# Altium PCB MAIN-4.PcbDoc
Units mil, origin at the board's own origin, x right, y up, seen from the top; angles counter-clockwise.
Board outline 2866.14 x 3216.54 mil, 4 copper layers (Top Layer, GND Plane, Power Plane, Bottom Layer); 59 components, 127 nets, 378 pads, 115 vias.
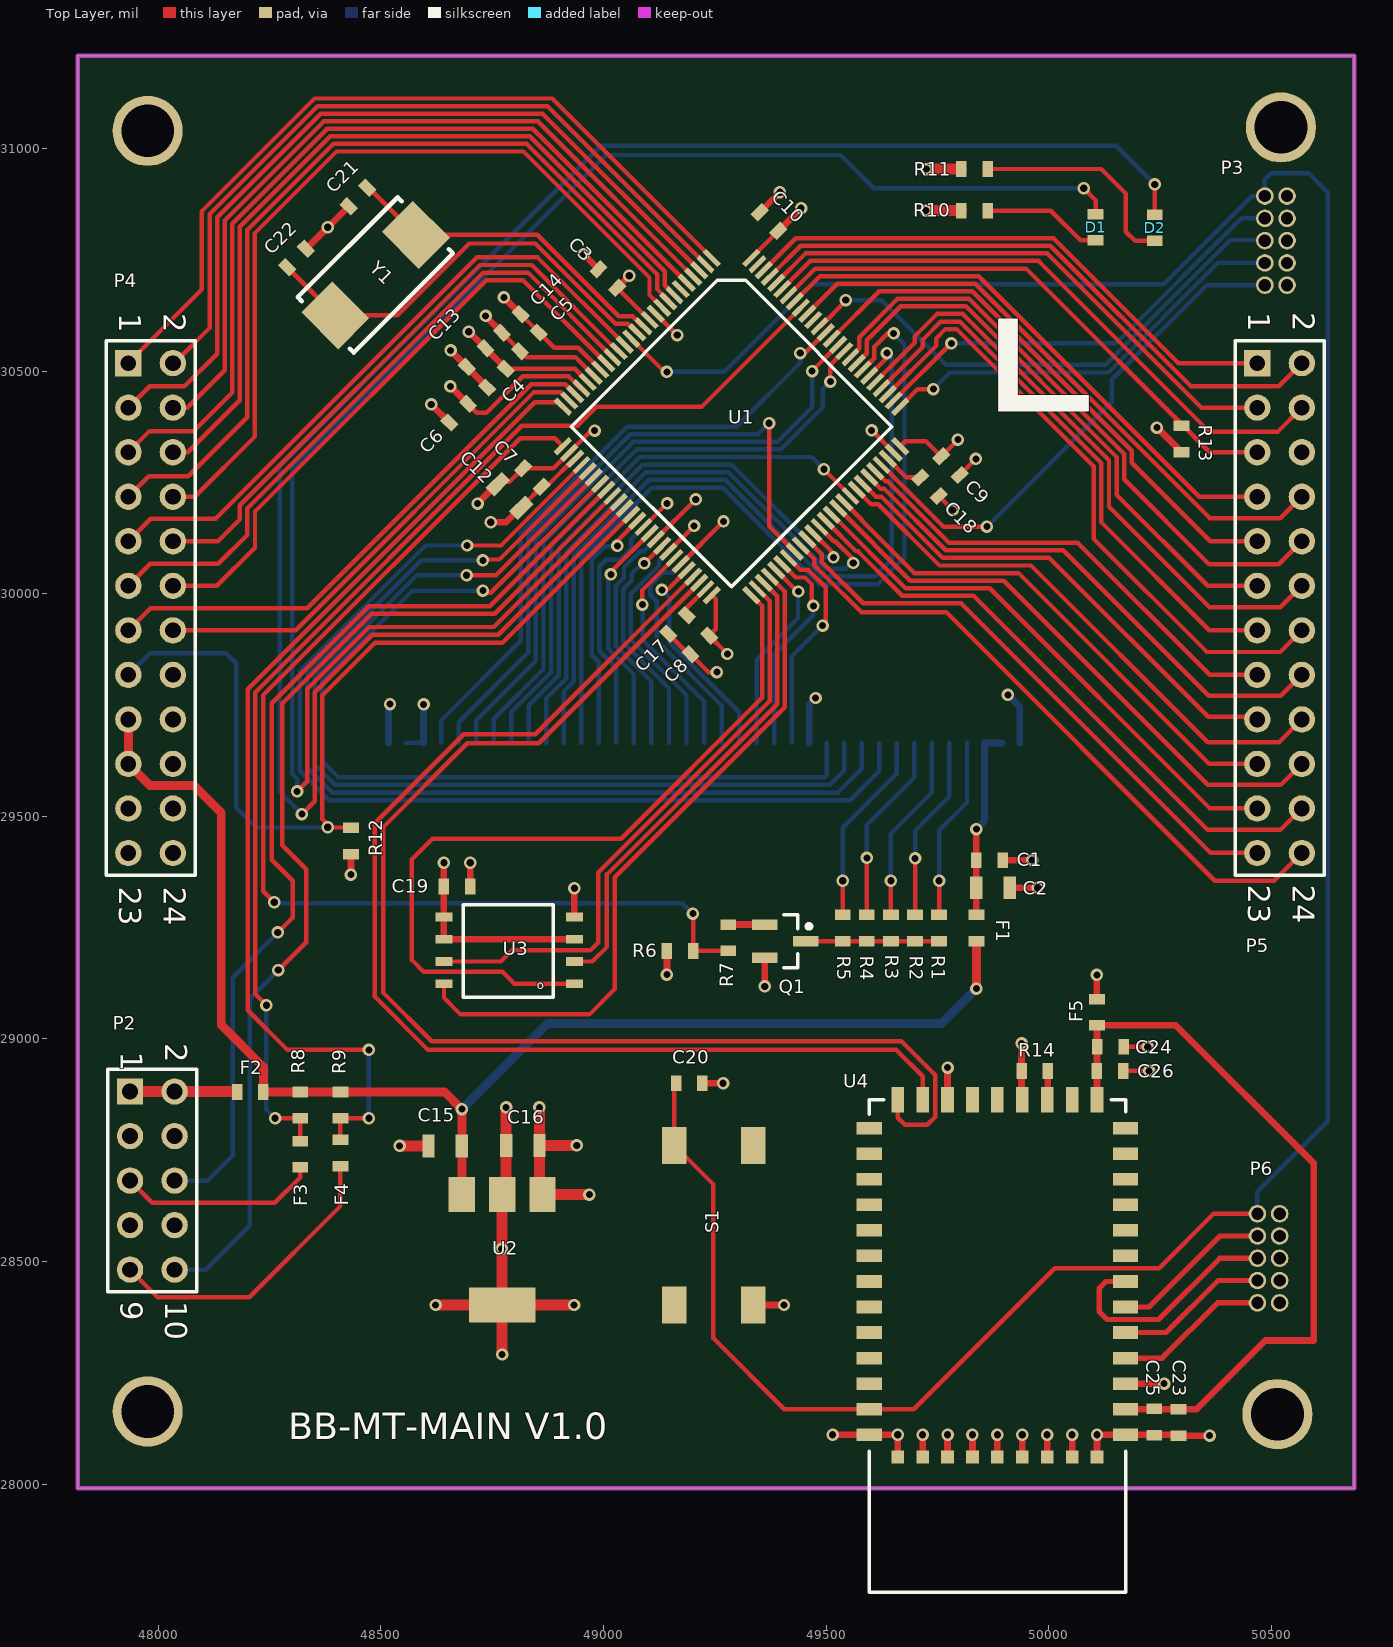
[diagram p0: Top Layer view]
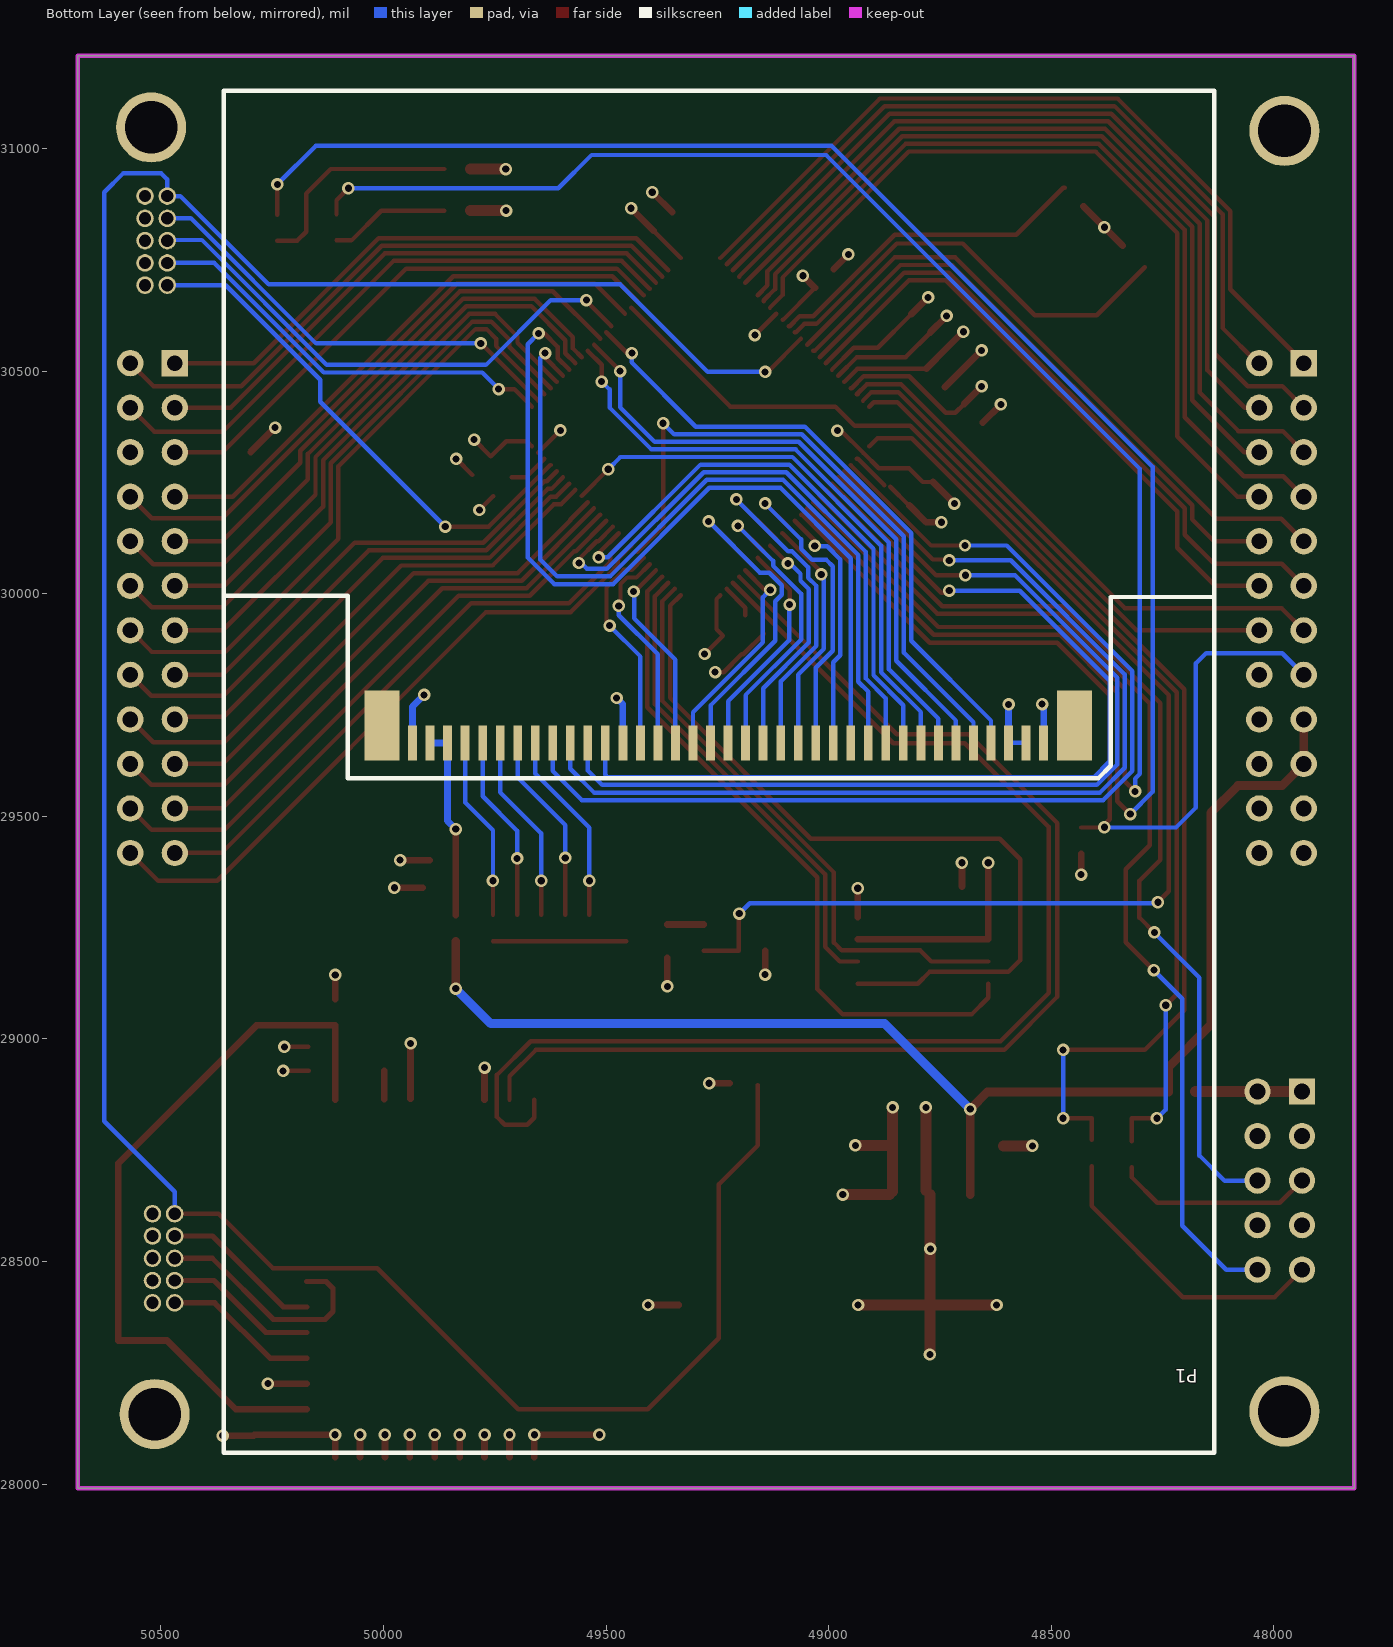
[diagram p1: Bottom Layer view, seen from below]
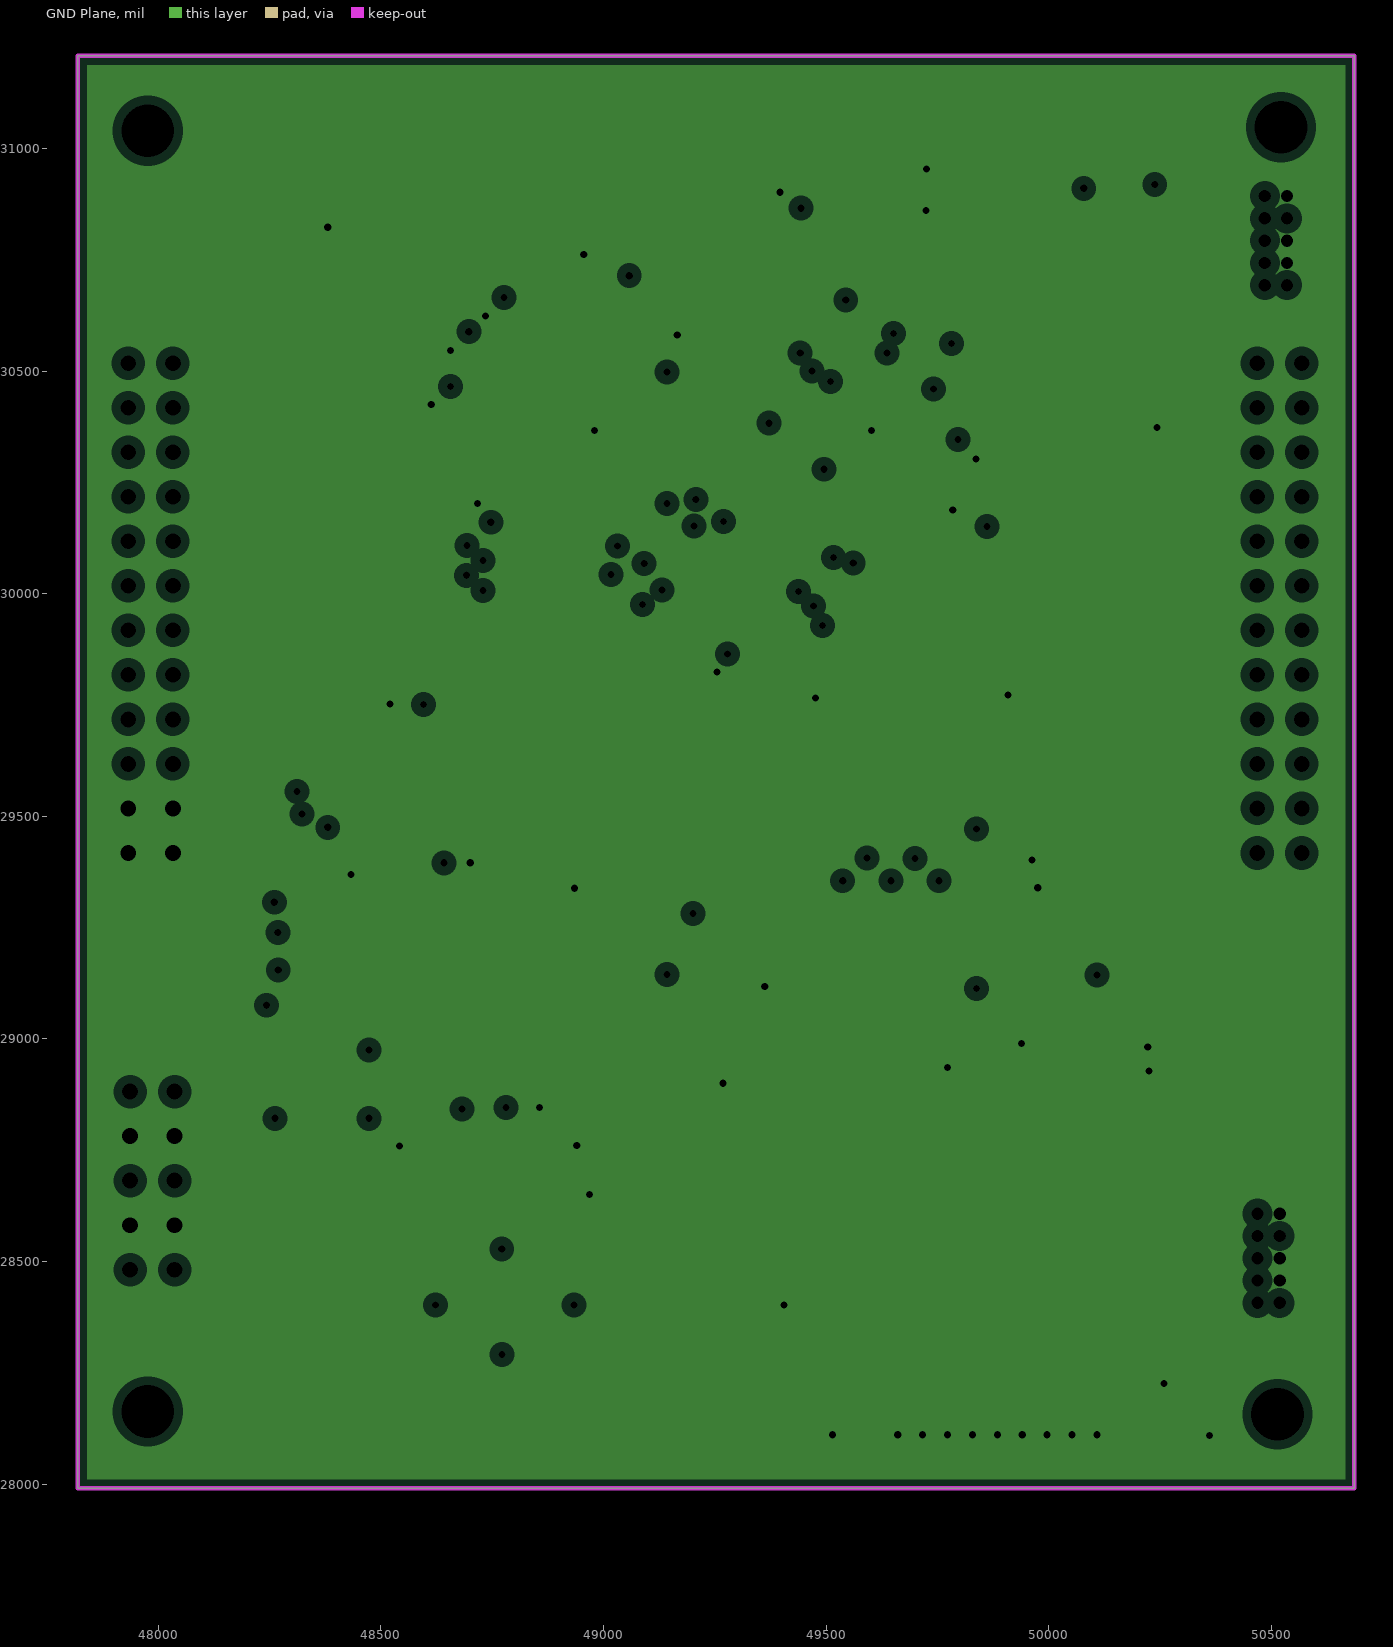
[diagram p2: GND Plane, clearances drawn from the general rule]
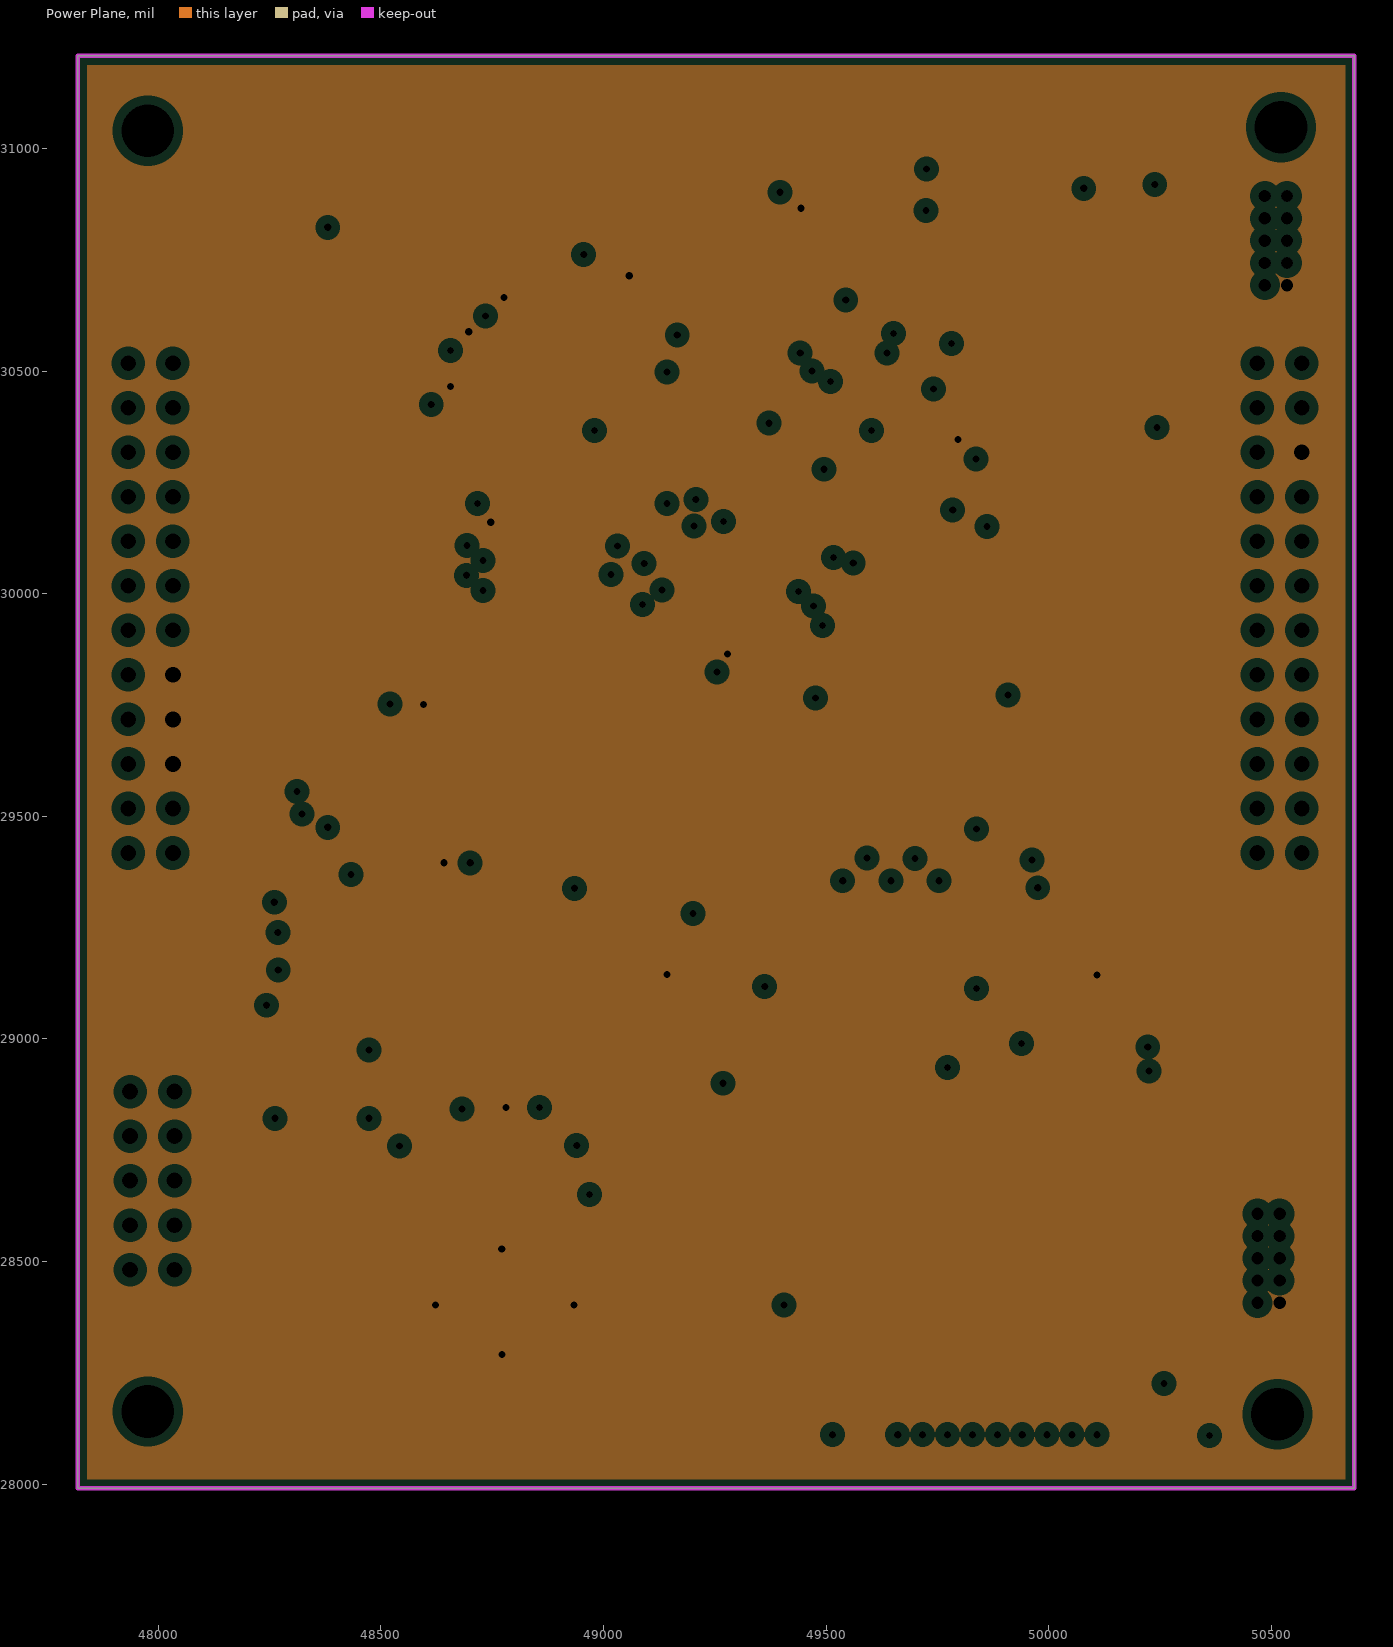
[diagram p3: Power Plane, clearances drawn from the general rule]

## Layer stack, top to bottom
Top Layer: signal copper 1.4
Dielectric: core 12.6, FR-4, Dk 4.8
GND Plane: plane copper 1.4, net GND
Dielectric: prepreg 12.6, FR-4, Dk 4.8
Power Plane: plane copper 1.4, net 3V3
Dielectric: core 12.6, FR-4, Dk 4.8
Bottom Layer: signal copper 1.4

## Board outline
47819.88,27991.14 50686.02,27991.14 50686.02,31207.68 47819.88,31207.68

## Design rules (kind name [scope] priority, off if disabled: settings)
Clearance [All] p1: gap=7
ComponentClearance [All] p1: gap=10 collisioncheckmode=3 verticalgap=0 showdistances=FALSE
HoleSize [All] p1: absolutevalues=TRUE maxlimit=250 minlimit=15 maxpercent=80.000 minpercent=20.000
MinimumAnnularRing [All] p1: minimumring=5
MinimumSolderMaskSliver FinePitchQFP [InComponent('U2') vs InComponent('U2')] p1: minsoldermaskwidth=0
MinimumSolderMaskSliver [All] p2: minsoldermaskwidth=10
PlaneClearance [All] p1: clearance=20
PlaneConnect [All] p1: planeconnectstyle=Relief reliefexpansion=20 reliefentries=4 reliefconductorwidth=10 reliefairgap=10
PolygonConnect ViaConnect [IsVia] p1: connectstyle=Direct reliefconductorwidth=10 reliefentries=4 polygonreliefangle="90 Angle"
PolygonConnect [All] p2: connectstyle=Relief reliefconductorwidth=10 reliefentries=4 polygonreliefangle="90 Angle"
RoutingPriority [InNet('GND')] p1: routingpriority=100
RoutingVias [All] p1: holewidth=15 width=20 viastyle="Through Hole" minholewidth=10 minwidth=15 maxholewidth=28 maxwidth=300
SMDNeckDown SMDNeckDown5v [InNet('5V')] p1: percent=100.000
SMDNeckDown SMDNeckDown3v3 [InNet('3V3')] p2: percent=100.000
SilkscreenOverComponentPads [All] p1: minsilkscreentomaskgap=10
SolderMaskExpansion [All] p1: expansion=4
Width Width_3V [InNet('3V3')] p1: maxlimit=25 minlimit=10 preferedwidth=25
Width Width_5V [InNet('5V')] p2: maxlimit=25 minlimit=10 preferedwidth=25
Width [All] p3: maxlimit=50 minlimit=10 preferedwidth=10
21 further rules are at their usual default settings.

## Classes and differential pairs
component class MAIN: C3 C4 C5 C6 C7 C8 C9 C10 C12 C13 C14 C15 C16 C17 C18 C19 C20 C21 C22 D1 D2 F2 F3 F4 P2 P3 P4 P5 R8 R9 R10 R11 R12 R13 S1 U1 U2 U3 Y1
component class WIFI: C23 C24 C25 C26 F5 P6 R14 U4
component class LCD: C1 C2 F1 P1 Q1 R1 R2 R3 R4 R5 R6 R7

## Components (designator, comment, footprint, x,y, rotation, side; value= is the part's Value field where it differs from the comment)
C1 "Cap" 0603 49867.13,29401.57 r180 top
C2 "Cap" 0805 49875,29339.57 r180 top
C3 "Cap" 0603 49009.84,30707.68 r315 top
C4 "Cap" 0603 48759.63,30484.04 r45 top
C5 "Cap" 0603 48833.45,30565.73 r45 top
C6 "Cap" 0603 48674.99,30405.3 r45 top
C7 "Cap" 0603 48840.55,30260.83 r315 top
C8 "Cap" 0603 49216.54,29884.84 r45 top
C9 "Cap" 0603 49779.53,30287.4 r135 top
C10 "Cap" 0603 49372.05,30835.63 r315 top
C12 "Cap" 0805 48789.37,30219.49 r315 top
C13 "Cap" 0603 48714.36,30530.3 r45 top
C14 "Cap" 0603 48793.1,30607.07 r45 top
C15 "Cap" 0805 48644.68,28759.84 r0 top
C16 "Cap" 0805 48818.9,28760.83 r180 top
C17 "Cap" 0603 49166.34,29931.1 r45 top
C18 "Cap" 0603 49732.28,30240.16 r135 top
C19 "Cap" 0603 48671.26,29342.52 r180 top
C20 "Cap" 0603 49192.91,28900.59 r180 top
C21 "Cap" 0603 48448.82,30890.75 r45 top
C22 "Cap" 0603 48311.02,30753.94 r225 top
C23 "Cap" 0603 50291.34,28138.78 r90 top
C24 "Cap" 0603 50138.78,28982.28 r180 top
C25 "Cap" 0603 50237.2,28139.76 r90 top
C26 "Cap" 0603 50137.8,28928.15 r180 top
D1 "LED2" 0603 50105.32,30822.83 r270 top
D2 "LED2" 0603 50238.19,30821.85 r270 top
F1 "Ferrite Chip" 0603 49837.6,29249.02 r90 top
F2 "Ferrite Chip" 0603 48206.69,28880.91 r0 top
F3 "Ferrite Chip" 0603 48318.9,28741.14 r270 top
F4 "Ferrite Chip" 0603 48409.45,28744.09 r270 top
F5 "Ferrite Chip" 0603 50108.27,29060.04 r90 top
P1 "ER-TFT032-2" ER-TFT032-2 49246.46,29599.84 r0 bottom locked
P2 "PWR_BRD" HDR2X5 47937.01,28881.89 r270 top
P3 "MCU JTAG" "JTAG PTH" 50535.43,30692.91 r180 top
P4 "Header 12X2" HDR2X12 47933.07,30517.72 r270 top locked
P5 "Header 12X2" HDR2X12 50468.5,30517.72 r270 top locked
P6 "ISM JTAG" "JTAG PTH" 50518.7,28407.48 r180 top
Q1 "NPN" SOT23_M 49408.46,29219.49 r0 top
R1 "Res2" 0603 49753.94,29249.02 r90 top
R2 "Res2" 0603 49699.8,29249.02 r90 top
R3 "Res2" 0603 49645.67,29249.02 r90 top
R4 "Res2" 0603 49591.54,29249.02 r90 top
R5 "Res2" 0603 49537.4,29249.02 r90 top
R6 "Res2" 0603 49172.24,29197.83 r180 top
R7 "Res2" 0603 49280.51,29227.36 r270 top
R8 "Res2" 0603 48318.9,28851.38 r90 top
R9 "Res2" 0603 48409.45,28851.38 r90 top
R10 "Res2" 0603 49833.66,30860.24 r0 top
R11 "Res2" 0603 49833.66,30953.74 r0 top
R12 "Res2" 0603 48433.07,29444.88 r90 top
R13 "Res2" 0603 50298.23,30347.44 r90 top
R14 "Res2" 0603 49968.5,28928.15 r180 top
S1 "SW-PB" FSM4JSMA 49248.03,28581.69 r180 top
U1 "STM32F205" LQFP-100 49243.11,30753.94 r315 top locked
U2 "NCP1117LP" SOT-223 48772.64,28650.59 r180 top
U3 "S25FL032P" SOC008 48949.8,29124.02 r180 top
U4 "ISM43xx" ISM-WIFI 50158.46,28111.22 r180 top locked
Y1 "XTAL" ABM2 48488.19,30715.55 r45 top

## Footprints (in the part's own frame and the unit in brackets; to place one, negate y for a bottom-side part, rotate by r counter-clockwise, add the part's x,y. Pads: shape width x height; smd on the part's side, far side on the other; paste and mask are expansions set on the pad)
0603 [mm]
  rect 0.6x0.9 smd: 1(-0.75,0) 2(0.75,0)
0805 [mm]
  rect 0.7x1.3 smd: 1(-0.95,0) 2(0.95,0)
ABM2 [mm] "ABM2 Crystal"
  rect 2.5x3 smd: 1(-3.25,0) 2(3.25,0)
  silkscreen extent -4.03,-2.25 4.03,2.25
ER-TFT032-2 [mm] "East Rising 3.2\" TFT LCD"
  rect 0.5x2 smd: 1(-18.52,-1.65) 2(-17.52,-1.65) 3(-16.52,-1.65) 4(-15.52,-1.65) 5(-14.52,-1.65) 6(-13.52,-1.65) 7(-12.52,-1.65) 8(-11.52,-1.65) 9(-10.52,-1.65) 10(-9.52,-1.65) 11(-8.52,-1.65) 12(-7.52,-1.65) 13(-6.52,-1.65) 14(-5.52,-1.65) 15(-4.52,-1.65) 16(-3.52,-1.65) 17(-2.52,-1.65) 18(-1.52,-1.65) 19(-0.52,-1.65) 20(0.48,-1.65) 21(1.48,-1.65) 22(2.48,-1.65) 23(3.48,-1.65) 24(4.48,-1.65) 25(5.48,-1.65) 26(6.48,-1.65) 27(7.48,-1.65) 28(8.48,-1.65) 29(9.48,-1.65) 30(10.48,-1.65) 31(11.48,-1.65) 32(12.48,-1.65) 33(13.48,-1.65) 34(14.48,-1.65) 35(15.48,-1.65) 36(16.48,-1.65) 37(17.48,-1.65)
  rect 2x4 smd: ""(-20.275,-2.65) ""(19.225,-2.65)
  silkscreen extent -28.25,-38.85 28.25,38.85
FSM4JSMA [mm] "SWITCH TACTILE SPST-NO 0.05A 12V"
  rect 1.4x2.1 smd: 1(-2.25,4.55) 2(2.25,-4.55) ""(-2.25,-4.55) ""(2.25,4.55)
HDR2X5 [mm] "Connector; Header; 5x2 Position"
  rect 1.5x1.5 hole 0.9: 1(0,0)
  round 1.5 hole 0.9: 2(0,2.54) 3(2.54,0) 4(2.54,2.54) 5(5.08,0) 6(5.08,2.54) 7(7.62,0) 8(7.62,2.54) 9(10.16,0) 10(10.16,2.54)
  silkscreen extent -1.27,-1.27 11.43,3.81
HDR2X12 [mm] "Connector; Header; 12x2 Position"
  rect 1.5x1.5 hole 0.9: 1(0,0)
  round 1.5 hole 0.9: 2(0,2.54) 3(2.54,0) 4(2.54,2.54) 5(5.08,0) 6(5.08,2.54) 7(7.62,0) 8(7.62,2.54) 9(10.16,0) 10(10.16,2.54) 11(12.7,0) 12(12.7,2.54) 13(15.24,0) 14(15.24,2.54) 15(17.78,0) 16(17.78,2.54) 17(20.32,0) 18(20.32,2.54) 19(22.86,0) 20(22.86,2.54) 21(25.4,0) 22(25.4,2.54) 23(27.94,0) 24(27.94,2.54)
  silkscreen extent -1.27,-1.27 29.21,3.81
ISM-WIFI [mm]
  rect 1.44x0.72 smd: 1(-0.358,0) 2(-0.358,-1.457) 3(-0.358,-2.914) 4(-0.358,-4.371) 5(-0.358,-5.828) 6(-0.358,-7.285) 7(-0.358,-8.742) 8(-0.358,-10.199) 9(-0.358,-11.656) 10(-0.358,-13.113) 11(-0.358,-14.57) 12(-0.358,-16.027) 13(-0.358,-17.484) 23(14.267,-17.484) 24(14.267,-16.027) 25(14.267,-14.57) 26(14.267,-13.113) 27(14.267,-11.656) 28(14.267,-10.199) 29(14.267,-8.742) 30(14.267,-7.285) 31(14.267,-5.828) 32(14.267,-4.371) 33(14.267,-2.914) 34(14.267,-1.457) 35(14.267,0)
  rect 0.72x1.44 smd: 14(1.27,-19.114) 15(2.69,-19.114) 16(4.112,-19.114) 17(5.532,-19.114) 18(6.954,-19.114) 19(8.374,-19.114) 20(9.796,-19.114) 21(11.216,-19.114) 22(12.638,-19.114)
  rect 0.72x0.72 smd: 36(12.638,1.27) 37(11.216,1.27) 38(9.796,1.27) 39(8.374,1.27) 40(6.954,1.27) 41(5.532,1.27) 42(4.112,1.27) 43(2.69,1.27) 44(1.27,1.27)
  silkscreen extent -0.36,-19.11 14.27,8.97
"JTAG PTH" [mm]
  round 1 hole 0.7 mask+0: 1(0,0) 2(1.27,0) 3(0,-1.27) 4(1.27,-1.27) 5(0,-2.54) 6(1.27,-2.54) 7(0,-3.81) 8(1.27,-3.81) 9(0,-5.08) 10(1.27,-5.08)
LQFP-100 [mm]
  rect 1.2x0.3 smd: 1(0,0) 2(0,-0.5) 3(0,-1) 4(0,-1.5) 5(0,-2) 6(0,-2.5) 7(0,-3) 8(0,-3.5) 9(0,-4) 10(0,-4.5) 11(0,-5) 12(0,-5.5) 13(0,-6) 14(0,-6.5) 15(0,-7) 16(0,-7.5) 17(0,-8) 18(0,-8.5) 19(0,-9) 20(0,-9.5) 21(0,-10) 22(0,-10.5) 23(0,-11) 24(0,-11.5) 25(0,-12) 51(15.2,-12) 52(15.2,-11.5) 53(15.2,-11) 54(15.2,-10.5) 55(15.2,-10) 56(15.2,-9.5) 57(15.2,-9) 58(15.2,-8.5) 59(15.2,-8) 60(15.2,-7.5) 61(15.2,-7) 62(15.2,-6.5) 63(15.2,-6) 64(15.2,-5.5) 65(15.2,-5) 66(15.2,-4.5) 67(15.2,-4) 68(15.2,-3.5) 69(15.2,-3) 70(15.2,-2.5) 71(15.2,-2) 72(15.2,-1.5) 73(15.2,-1) 74(15.2,-0.5) 75(15.2,0)
  rect 0.3x1.2 smd: 26(1.6,-13.6) 27(2.1,-13.6) 28(2.6,-13.6) 29(3.1,-13.6) 30(3.6,-13.6) 31(4.1,-13.6) 32(4.6,-13.6) 33(5.1,-13.6) 34(5.6,-13.6) 35(6.1,-13.6) 36(6.6,-13.6) 37(7.1,-13.6) 38(7.6,-13.6) 39(8.1,-13.6) 40(8.6,-13.6) 41(9.1,-13.6) 42(9.6,-13.6) 43(10.1,-13.6) 44(10.6,-13.6) 45(11.1,-13.6) 46(11.6,-13.6) 47(12.1,-13.6) 48(12.6,-13.6) 49(13.1,-13.6) 50(13.6,-13.6) 76(13.6,1.6) 77(13.1,1.6) 78(12.6,1.6) 79(12.1,1.6) 80(11.6,1.6) 81(11.1,1.6) 82(10.6,1.6) 83(10.1,1.6) 84(9.6,1.6) 85(9.1,1.6) 86(8.6,1.6) 87(8.1,1.6) 88(7.6,1.6) 89(7.1,1.6) 90(6.6,1.6) 91(6.1,1.6) 92(5.6,1.6) 93(5.1,1.6) 94(4.6,1.6) 95(4.1,1.6) 96(3.6,1.6) 97(3.1,1.6) 98(2.6,1.6) 99(2.1,1.6) 100(1.6,1.6)
  silkscreen extent 1.14,-12.46 14.06,0.47
SOC008 [mm]
  rect 0.962x0.495 smd: 1(0.381,0) 2(0.381,-1.27) 3(0.381,-2.54) 4(0.381,-3.81) 5(7.82,0) 6(7.82,-1.27) 7(7.82,-2.54) 8(7.82,-3.81)
  silkscreen extent 1.6,-4.51 6.72,0.77
SOT23_M [mm] "SOT23, 3-Leads, Body 2.9x1.3mm, Pitch 0.95mm, Lead Span 2.3mm - Reverse Pinning, IPC Low Density"
  rect 1.45x0.6 smd: 1(1.175,0) 2(-1.175,-0.95) 3(-1.175,0.95)
  silkscreen extent -0.1,-1.5 1.48,1.5, body extent -0.7,-1.5 0.7,1.5, height 1.1
SOT-223 [mm]
  rect 1.5x2 smd: 1(-2.3,0) 2(0,0) 3(2.3,0)
  rect 3.8x2 smd: 4(0,6.3)

## Part data
C1 C2 C3 C4 C5 C6 C7 C8 C9 C10 C12 C13 C14 C15 C16 C17 C18 C19 C20 C21 C22 C23 C24 C25 C26: "Capacitor"
D1 D2: "Typical RED, GREEN, YELLOW, AMBER GaAs LED"
F1 F2 F3 F4 F5: library part Res2
P1: "3.2\" TFT LCD module with touch panel"
P2 P3 P6: library part "Header 5X2", "Header, 5-Pin, Dual row"
P4 P5: "Header, 12-Pin, Dual row"
Q1: "NPN Bipolar Transistor"
R1 R2 R3 R4 R5 R6 R7 R8 R9 R10 R11 R12 R13 R14: "Resistor"
S1: "Switch"
U1: library part STM32F20x-LQFP100, "STMicroelectronics STM32F20x LQFP100"
U2: "1.0 A Low-Dropout Positive  Fixed and Adjustable  Voltage Regulators"
U3: library part M25P80-VMN6TP, "IC FLASH 8MBIT 75MHZ SO8N"
U4: library part ISM4319, "Inventek Systems WiFi Module"
Y1: "Crystal Oscillator"

## Free pads (board coordinates)
  round 157.48 hole 118.11: 2(47976.38,28163.39) 3(50513.78,28157.48) 4(50521.65,31047.24) 5(47976.38,31039.37)

## Via types
v1: diameter 28, hole 16, Top Layer to Bottom Layer, 115 vias

## Nets (pads, with @x,y where several pads share a name; then routed paths per layer and width w, separated by ;. In a path a pad name is that pad's centre, name@x,y a point inside that pad or via, vN(x,y) a via of type N, cw(c..) or ccw(c..) an arc to the next point about the centre after c; other vN are vias at no path point)
3V3: C3.2 C4.2 C5.2 C6.2 C7.2 C8.2 C9.2 C10.2 C12.2 C13.2 C14.2 C16.2 C19.2 F5.2 P1.2 P1.3 P3.1 P4.16 P4.18 P4.20 P5.6 P6.1 R6.2 U1.11 U1.19 U1.21 U1.22 U1.28 U1.50 U1.75 U1.100 U2.2 U2.4 U3.3 U3.7 U3.8 | length 3369.9
  Top Layer w10: C6.2 48715.55,30406.5 48737.2,30406.5 48818.9,30488.19 48921.73,30488.19 48948.29,30461.63 U1.22 ; C4.2 48935.35,30504.92 U1.21 ; C14.2 48889.76,30552.17 48943.78,30552.17 U1.19 ; C12.2@48818.77,30197.96 48819.45,30197.96 C7.2 ; C7.2@48875.3,30243.88 48934.37,30302.95 U1.28 ; C3.2 U1.11@49102.78,30614.74 ; U1.50 49251.97,29987.86 49251.97,29920.28 C8.2 v1(49278.54,29864.59) ; U1.100 C10.2@49392.93,30814.67 ; U1.75 49677.99,30342.52 49724.41,30342.52 C9.2 v1(49796.26,30345.89)
  Top Layer w15: U3.7@48641.73,29224.21 C19.2 v1(48641.73,29395.67) ; U3.7 U3.3 ; v1(48656.5,30465.55) C6.2 ; v1@48698.05,30588.37 C13.2 C4.2@48780.51,30505.91 ; v1(48747.05,30160.43) 48781.24,30160.43 C12.2@48818.77,30197.96 ; v1(48776.57,30665.35) C14.2 ; C3.2 v1(49058.07,30714.15) ; v1(49142.72,29144.69) R6.2 ; C10.2 v1(49443.9,30865.72) ; F5.2 v1(50108.27,29143.7)
  Top Layer w25: v1(48623.03,28402.56) U2.4 ; v1(48772.64,28291.34) U2.4 ; U2.2 U2.4 ; U2.2@48781.5,28659.45 C16.2 v1(48781.5,28846.46) ; v1(48934.05,28402.56) U2.4
  Bottom Layer w10: P1.2 P1.3
  Bottom Layer w15: P1.3 v1(48596.07,29751.37)
  other v1: 48771.65,28528.54 48697.62,30588.37
5V: C15.2 F1.1 F2.2 P4.17 P4.19 R8.2 R9.2 U2.3 | length 3047.9
  Top Layer w20: P4.17 P4.19 47981.89,29568.9 48080.71,29568.9 48141.73,29507.87 48141.73,29031.5 48236.22,28937.01 F2.2 48643.7,28880.91 v1(48682.09,28842.52) U2.3 ; v1(49837.6,29113.19) F1.1
  Bottom Layer w20: v1(48682.09,28842.52) 48874.02,29034.45 49758.86,29034.45 v1(49837.6,29113.19)
BOOT0: P5.5 R13.2 U1.94 | length 1248.4
  Top Layer w10: U1.94 49475.52,30730.23 49948.91,30730.23 50361.42,30317.72 P5.5
BOOT1: P4.15 R12.2 U1.37 | length 2043.8
  Top Layer w10: R12.2@48432.58,29474.9 48387.3,29474.9 48368.91,29493.29 48368.91,29771.76 48486.91,29889.76 48773.14,29889.76 49061.05,30177.67 U1.37
  Bottom Layer w10: P4.15 47981.5,29866.14 48152.56,29866.14 48175.2,29843.5 48175.2,29519.69 48219.98,29474.9 48387.3,29474.9 48386.81,29475.39 v1(48380.91,29475.39)
D0: P1.9 U1.61 | length 1342.4
  Top Layer w10: U1.61 49516.73,30090.57 v1(49516.73,30081.69)
  Bottom Layer w10: P1.9 48832.29,29749.48 48899.4,29816.59 48899.4,30100.87 49088.52,30290 49287.76,30290 49496.06,30081.69 49523.64,30081.69 49516.73,30088.6 v1(49516.73,30081.69)
D1: P1.10 U1.62 | length 1383.7
  Top Layer w10: U1.62 49517.03,30118.11 49520.67,30118.11 49562.99,30075.79 49560.04,30072.83 49561.02,30071.85 v1(49561.02,30068.9)
  Bottom Layer w10: P1.10 48871.66,29764.81 48916.4,29809.55 48916.4,30093.83 49095.57,30273 49280.71,30273 49498.02,30055.69 49542.9,30055.69 49560.04,30072.83 49561.02,30071.85 v1(49561.02,30068.9)
D2: P1.11 U1.81 | length 1856.9
  Top Layer w10: U1.81 49636.81,30529.62 v1(49636.81,30540.35)
  Bottom Layer w10: P1.11 48911.03,29780.14 48933.4,29802.51 48933.4,30086.79 49102.61,30256 49273.67,30256 49490.98,30038.69 49609.56,30038.69 49647.64,30076.77 49647.64,30529.53 v1(49636.81,30540.35)
D3: P1.12 U1.82 | length 1951.1
  Top Layer w10: U1.82 49608.31,30528.96 49608.31,30554.18 49638.78,30584.65 v1(49651.57,30584.65)
  Bottom Layer w10: P1.12 48950.4,30079.75 49108.26,30237.61 49268.02,30237.61 49483.94,30021.69 49616.6,30021.69 49676.18,30081.27 49676.18,30560.04 v1(49651.57,30584.65)
D4: P1.13 U1.38 | length 551
  Top Layer w10: v1(49031.42,30107.28) 49031.42,30119.1 U1.38
  Bottom Layer w10: P1.13 48989.77,29845.86 48973.73,29861.9 48973.73,30076.93 49003.28,30106.47 v1@49018.8,30106.47
D5: P1.14 U1.39 | length 710.4
  Top Layer w10: U1.39 v1(49142.92,30202.76)
  Bottom Layer w10: P1.14 49029.14,29833.63 48990.73,29872.04 48990.73,30061.6 49004.92,30075.79 49036.69,30075.79 49062.01,30101.1 49062.01,30121.85 v1(49142.92,30202.76)
D6: P1.15 U1.40 | length 528
  Top Layer w10: v1(49016.73,30043.31) 49016.73,30048.73 U1.40
  Bottom Layer w10: v1@49010.6,30040.14 49010.6,29876.21 49068.51,29818.31 P1.15
D7: P1.16 U1.41 | length 786.5
  Top Layer w10: U1.41 v1(49207.45,30211.61)
  Bottom Layer w10: P1.16 49107.88,29802.98 49027.6,29883.25 49027.6,30017.4 49046.26,30036.07 49046.26,30059.35 49082.38,30095.47 49091.31,30095.47 v1(49207.45,30211.61)
D8: P1.17 U1.42 | length 524.9
  Top Layer w10: v1(49091.59,30067.91) U1.42
  Bottom Layer w10: v1(49091.59,30067.91) 49086.46,30067.91 49063.26,30044.72 49063.26,30029.02 49044.6,30010.36 49044.6,29890.3 49147.25,29787.65 P1.17
D9: P1.18 U1.43 | length 680.2
  Top Layer w10: U1.43 v1(49203.74,30152.22)
  Bottom Layer w10: P1.18 49186.62,29772.32 49061.6,29897.34 49061.6,29999.43 49125,30062.83 49125,30073.48 v1(49203.74,30152.22)
D10: P1.19 U1.44 | length 502.8
  Top Layer w10: v1(49087.6,29975.39) 49087.6,30008.24 U1.44
  Bottom Layer w10: v1(49087.6,29975.39) 49088.04,29975.39 49088.33,29975.1 49088.33,29895.92 49225.99,29758.27 P1.19
D11: P1.20 U1.45 | length 780.3
  Top Layer w10: U1.45 v1(49269.68,30162.49)
  Bottom Layer w10: P1.20 49265.36,29748.99 49120.08,29894.27 49120.08,29982.84 49105.33,29997.58 49105.33,30019.12 49133.46,30047.24 49154.44,30047.24 v1(49269.68,30162.49)
D12: P1.21 U1.46 | length 480.6
  Top Layer w10: v1(49131.33,30008.35) 49143.39,30008.35 U1.46
  Bottom Layer w10: v1@49137.76,30001.93 49147.64,29992.05 49147.64,29890.75 49304.73,29733.66 P1.21
D13: P1.22 U1.55 | length 451.3
  Top Layer w10: U1.55 49435.35,30004.92 v1(49437.99,30004.92)
  Bottom Layer w10: P1.22 49344.1,29851.97 49437.01,29944.88 v1@49437.01,30007.87
D14: P1.23 U1.56 | length 477.5
  Top Layer w10: U1.56 49431.69,30036.42 49452.76,30036.42 49467.52,30021.65 v1@49467.52,29972.44
  Bottom Layer w10: P1.23 49383.47,29863.78 49471.46,29951.77 v1(49471.46,29972.44)
D15: P1.24 U1.57 | length 491.6
  Top Layer w10: U1.57 49442.53,30053.42 49459.8,30053.42 49499.02,30014.2 49499.02,29935.04 v1(49492.13,29928.15)
  Bottom Layer w10: P1.24 49422.84,29858.86 v1(49492.13,29928.15)
EXP_RX: P5.22 U1.63 | length 1376.8
  Top Layer w10: U1.63 49568.08,30094.9 49571.79,30094.9 49671.34,29995.35 49831.28,29995.35 50357.14,29469.49 50520.28,29469.49 P5.22
EXP_TX: P5.21 U1.64 | length 1228.7
  Top Layer w10: U1.64 49678.47,30012.35 49867.57,30012.35 50362.2,29517.72 P5.21
FLSH_CS: U1.51 U3.1 | length 1790.6
  Top Layer w10: U3.1 48800.2,29124.02 48773.62,29150.59 48596.46,29150.59 48569.88,29177.17 48569.88,29403.54 48616.14,29449.8 49040.08,29449.8 49356.3,29766.02 49356.3,29972.62 U1.51
GND: C1.1 C2.1 C3.1 C4.1 C5.1 C6.1 C7.1 C8.1 C9.1 C10.1 C12.1 C13.1 C14.1 C15.1 C16.1 C17.1 C18.1 C19.1 C20.1 C21.1 C22.1 C23.1 C24.1 C25.1 C26.1 P1.1 P1.25 P1.37 P2.3 P2.4 P2.7 P2.8 P3.3 P3.5 P3.9 P4.21 P4.22 P4.23 P4.24 P6.3 P6.5 P6.9 Q1.2 R10.1 R11.1 R12.1 R13.1 R14.2 S1.1 U1.10 U1.20 U1.27 U1.74 U2.1 U3.4 U4.1 U4.3 U4.17 U4.20 U4.35 U4.36 U4.37 U4.38 U4.39 U4.40 U4.41 U4.42 U4.43 U4.44 | length 4128.2
  Top Layer w10: C12.1@48765.88,30250.86 48788.82,30250.86 C7.1 48887.8,30281.71 U1.27 48972.24,30366.14 v1(48980.32,30366.14) ; C14.1 48826.92,30531.5 48936.61,30531.5 U1.20 ; U1.10 v1(49165.79,30580.71) ; C17.1 49191.72,29863.96 C8.1 49235.8,29823.82 v1(49254.92,29823.82) ; v1(49602.36,30366.85) U1.74 ; C18.1 v1(49784.45,30187.99) ; C9.1 v1(49836.61,30302.73) ; C26.1 v1(50225.39,28928.15) ; C24.1 v1(50222.44,28982.28)
  Top Layer w15: C22.1@48339.78,30781.71 C21.1 ; v1(48433.07,29369.09) R12.1 ; v1(48613.33,30425.2) C6.1 ; v1(48656.64,30546.26) C13.1 C4.1@48738.75,30464.15 ; C19.1 v1(48700.79,29395.67) ; v1(48717.52,30202.5) C12.1@48765.88,30250.86 ; v1(48735.24,30624.02) 48735.24,30623.18 C14.1 ; U3.4 v1(48934.8,29338.35) ; v1(48955.71,30761.81) 48958.66,30758.86 C3.1 ; C20.1 v1(49268.7,28900.59) ; S1.1 v1(49405.51,28402.56) ; C10.1 v1(49396.23,30901.57) ; v1(49362.2,29118.11) Q1.2 ; v1(49514.76,28111.22) U4.35 v1(49660.92,28111.22) U4.36 ; U4.37 v1(49716.87,28111.22) ; U4.38 v1(49772.81,28111.22) ; U4.20 v1(49772.81,28935.85) ; U4.39 v1(49828.76,28111.22) ; U4.40 v1(49884.7,28111.22) ; C1.1 v1(49962.6,29401.57) ; C2.1 v1(49975.39,29339.57) ; U4.17@49938.98,28865.41 R14.2 v1(49938.98,28990.16) ; U4.41 v1(49940.65,28111.22) ; U4.42 v1(49996.59,28111.22) ; U4.43 v1(50052.54,28111.22) ; U4.44 v1(50108.48,28111.22) U4.1 C23.1@50289.37,28111.22 ; U4.3 v1(50259.29,28225.94) ; v1(50243.11,30373.03) R13.1 ; C23.1 v1(50361.22,28109.25)
  Top Layer w25: v1(48542.32,28759.84) C15.1 ; U2.1@48856.3,28657.48 C16.1 ; v1(48856.3,28846.46) C16.1 ; U2.1 v1(48968.5,28650.59) ; v1(48939.96,28760.83) C16.1 ; v1(49724.41,30860.24) R10.1 ; v1(49725.39,30953.74) R11.1
  Bottom Layer w15: P1.1 48517.33,29751.58 48517.72,29751.97 v1(48520.67,29751.97) ; P1.25 49462.21,29751.58 v1(49476.38,29765.75) ; v1(49908.46,29772.64) 49934.65,29746.46 P1.37
  other v1: 48380.91,30822.83
ISM_ADC0: U4.13
ISM_ADC1: U4.12
ISM_ADC2: U4.11
ISM_ADC3: U4.10
ISM_ADC4: U4.9
ISM_CFG0: U4.28
ISM_CFG1: U4.29
ISM_DM: U4.19
ISM_DP: U4.18
ISM_GPIO0: U4.23
ISM_GPIO1: U4.24
ISM_GPIO2: U4.25
ISM_GPIO3: U4.26
ISM_GPIO4: U4.27
ISM_MISO: U4.31
ISM_MOSI: U4.30
ISM_SCK: U4.32
ISM_SSN: U4.33
ISM_TCK: P6.4 U4.5 | length 344.5
  Top Layer w12: U4.5 50263.9,28340.67 50380.71,28457.48 P6.4
ISM_TDI: P6.8 U4.6 | length 362.2
  Top Layer w12: U4.6 50224.8,28398.03 50384.25,28557.48 P6.8
ISM_TDO: P6.6 U4.7 | length 537.7
  Top Layer w12: U4.7 50128.62,28455.39 50113.19,28439.96 50113.19,28387.8 50130.91,28370.08 50247.05,28370.08 50384.45,28507.48 P6.6
ISM_TMS: P6.2 U4.4 | length 347.6
  Top Layer w12: U4.4 50254.76,28283.31 50378.94,28407.48 P6.2
ISM_TRSTN: U4.8
JTCK: P3.4 U1.76 | length 953
  Top Layer w10: U1.76 49706.03,30459.65 v1(49741.14,30459.65)
  Bottom Layer w10: v1(49741.14,30459.65) 49778.28,30496.78 50134.16,30496.78 50380.29,30742.91 P3.4
JTDI_MCU: P3.8 U1.77 | length 1002.3
  Top Layer w10: U1.77 v1@49781.03,30562.48
  Bottom Layer w10: v1(49781.5,30562.01) 50151.3,30562.01 50432.21,30842.91 P3.8
JTDO_MCU: P3.6 U1.89 | length 1199.1
  Top Layer w10: U1.89@49487.82,30600.82 v1@49545.37,30658.37
  Bottom Layer w10: v1(49544.29,30659.45) 49624.02,30659.45 49769.68,30513.78 50127.11,30513.78 50407.63,30794.29 P3.6@50485.43,30794.29
JTMS: P3.2 U1.72 | length 1171.7
  Top Layer w10: U1.72 49625.4,30289.03 49763.84,30150.59 v1(49861.22,30150.59)
  Bottom Layer w10: v1(49861.22,30150.59) 50141.73,30431.1 50141.73,30480.31 50354.33,30692.91 P3.2
LED_GRN: D1.1 U1.35 | length 4011.1
  Top Layer w10: v1(48312.01,29556.1) 48334.91,29579.01 48334.91,29785.85 48474.26,29925.2 48754,29925.2 U1.35 ; v1(50078.74,30910.43) 50105.31,30883.86 D1.1
  Bottom Layer w10: v1(48312.01,29556.1) 48312.01,29584.23 48300.91,29595.32 48300.91,30280.24 49005.91,30985.24 49532.48,30985.24 49607.28,30910.43 v1(50078.74,30910.43)
LED_RED: D2.1 U1.36 | length 4322
  Top Layer w10: v1(48322.83,29504.92) 48351.91,29534 48351.91,29778.8 48480.59,29907.48 48764.13,29907.48 U1.36 ; D2.1 v1(50238.19,30919.29)
  Bottom Layer w10: v1(48322.83,29504.92) 48272.64,29555.12 48272.64,30284.87 48993.68,31005.91 50151.57,31005.91 v1(50238.19,30919.29)
NetC1_2: C1.2 C2.2 F1.2 P1.35 P1.36 | length 433.2
  Top Layer w15: F1.2 v1(49837.6,29471.46)
  Bottom Layer w15: v1(49837.6,29471.46) 49855.91,29489.76 P1.35 P1.36
NetC17_2: C17.2 U1.49 | length 76
  Top Layer w10: C17.2 49187.22,29968.67 U1.49
NetC18_2: C18.2 U1.73 | length 90.3
  Top Layer w10: U1.73 49680.33,30261.04 C18.2
NetC21_2: C21.2 U1.12 Y1.2 | length 749
  Top Layer w10: C21.2 48473.07,30911.63 Y1.2 48851.45,30806.03 49034.62,30622.86 49065.44,30622.86 49087.48,30600.82 U1.12
NetC22_2: C22.2 U1.13 Y1.1 | length 980.3
  Top Layer w10: C22.2@48289.94,30732.85 Y1.1 48537.48,30625.07 48698.82,30786.42 48847.02,30786.42 49027.57,30605.86 49054.6,30605.86 49073.56,30586.9 U1.13
NetC23_2: C23.2 C24.2 C25.2 C26.2 F5.1 U4.2 U4.14 | length 1666.5
  Top Layer w15: F5.1 50285.43,29030.51 50595.47,28720.47 50595.47,28322.83 50486.22,28322.83 50331.69,28168.31 C23.2 U4.2@50172.83,28168.31 ; U4.14 F5.1@50108.48,29030.3
NetD1_2: D1.2 R10.2 | length 269.8
  Top Layer w10: R10.2 50004.92,30860.24 50071.85,30793.31 D1.2
NetD2_2: D2.2 R11.2 | length 492
  Top Layer w10: R11.2 50118.11,30953.74 50173.23,30898.62 50173.23,30812.99 50193.9,30792.32 D2.2
NetF3_2: F3.2 P2.5 | length 448.9
  Top Layer w10: P2.5 47987.01,28631.89 48261.81,28631.89 48318.9,28688.98 F3.2
NetF4_2: F4.2 P2.9 | length 672.3
  Top Layer w10: P2.9 47998.62,28420.28 48204.72,28420.28 48409.45,28625 F4.2
NetP1_30: P1.30 R5.2 | length 436.7
  Top Layer w10: R5.2 v1(49537.4,29355.31)
  Bottom Layer w10: v1(49537.4,29355.31) 49537.4,29474.41 49659.06,29596.06 P1.30
NetP1_31: P1.31 R4.2 | length 430.5
  Top Layer w10: R4.2 v1(49591.53,29406.5)
  Bottom Layer w10: v1(49591.53,29406.5) 49591.53,29480.31 49698.43,29587.21 P1.31
NetP1_32: P1.32 R3.2 | length 424.4
  Top Layer w10: R3.2 v1(49645.67,29355.31)
  Bottom Layer w10: v1(49645.67,29355.31) 49645.67,29461.61 49737.8,29553.74 P1.32
NetP1_33: P1.33 R2.2 | length 418.3
  Top Layer w10: R2.2 v1(49699.8,29405.51)
  Bottom Layer w10: v1(49699.8,29405.51) 49699.8,29467.52 49777.17,29544.88 P1.33
NetP1_34: P1.34 R1.2 | length 412.2
  Top Layer w10: R1.2 v1(49753.94,29355.32)
  Bottom Layer w10: v1(49753.94,29355.32) 49753.94,29468.5 49816.54,29531.1 P1.34
NetQ1_1: Q1.1 R1.1 R2.1 R3.1 R4.1 R5.1 | length 299.2
  Top Layer w10: Q1.1 R1.1
NetQ1_2: Q1.3 R7.1 | length 81.7
  Top Layer w15: R7.1 Q1.3
NetR14_1: R14.1 U4.16 | length 63
  Top Layer w15: U4.16@49998.03,28865.18 R14.1
NJTRST: U1.90
OW1: F3.1 R8.1 U1.92 | length 2665.3
  Top Layer w10: v1(48243.11,29075.79) 48218.5,29100.39 48218.5,29778.69 48816.78,30376.97 48941.93,30376.97 48985.24,30420.28 49221.24,30420.28 U1.92 ; v1(48262.8,28821.85) R8.1 F3.1
  Bottom Layer w10: v1(48243.11,29075.79) 48243.11,28841.54 v1(48262.8,28821.85)
OW2: F4.1 R9.1 U1.25 | length 2274.4
  Top Layer w10: F4.1 R9.1 v1(48473.43,28821.85) ; v1(48473.43,28975.39) 48290.35,28975.39 48201.5,29064.24 48201.5,29785.73 48845.62,30429.85 48899.07,30429.85 U1.25
  Bottom Layer w10: v1(48473.43,28821.85) v1(48473.43,28975.39)
PA0: P4.13 U1.23 | length 1244.7
  Top Layer w10: P4.13 47982.87,29967.52 48334.65,29967.52 48837.6,30470.47 48914.12,30470.47 U1.23 U1.23@48934.37,30447.71
PA1: P4.14 U1.24 | length 1119.4
  Top Layer w10: P4.14 48308.88,29917.72 48843.92,30452.75 48904.01,30452.75 U1.24
PA9: P5.18 U1.68 | length 1255.8
  Top Layer w10: U1.68 49600.98,30201.2 49617.07,30201.2 49754.92,30063.35 49960.28,30063.35 50357.28,29666.34 50517.13,29666.34 P5.18
PA10: P5.17 U1.69 | length 1111.6
  Top Layer w10: U1.69 49611.82,30218.2 49624.11,30218.2 49761.96,30080.35 50001.35,30080.35 50358.27,29723.43 P5.17@50477.36,29723.43
PA11: P5.16 U1.70 | length 1194.5
  Top Layer w10: U1.70 49622.66,30235.2 49631.15,30235.2 49769,30097.35 50032.57,30097.35 50359.25,29770.67 50521.46,29770.67 P5.16
PA12: P5.15 U1.71 | length 1047.4
  Top Layer w10: U1.71 49633.49,30252.2 49638.19,30252.2 49776.04,30114.35 50064.79,30114.35 50361.42,29817.72 P5.15
PB5: P5.8 U1.91 | length 1377.3
  Top Layer w10: U1.91 49525.04,30696.23 49835.27,30696.23 50362.2,30169.29 50520.08,30169.29 P5.8
PB7: P5.7 U1.93 | length 1267.6
  Top Layer w10: U1.93 49486.36,30713.23 49842.87,30713.23 50338.39,30217.72 P5.7
PB8: P5.4 U1.95 | length 1373.6
  Top Layer w10: U1.95 49464.68,30747.23 49977.18,30747.23 50360.24,30364.17 50514.96,30364.17 P5.4
PB9: P5.3 U1.96 | length 1251.5
  Top Layer w10: U1.96 49453.84,30764.23 49996.74,30764.23 50343.26,30417.72 P5.3
PC0: P4.9 U1.15 | length 1460.5
  Top Layer w10: P4.9 47983.66,30168.31 48128.94,30168.31 48715.82,30755.19 48852.11,30755.19 U1.15
PC1: P4.10 U1.16 | length 1357
  Top Layer w10: P4.10 48134.45,30117.72 48183.52,30166.79 48183.52,30198.85 48722.86,30738.19 48838.76,30738.19 49031.8,30545.15 U1.16
PC2: P4.11 U1.17 | length 1492.1
  Top Layer w10: P4.11 47982.28,30066.93 48134.84,30066.93 48200.52,30132.61 48200.52,30191.81 48729.9,30721.19 48830.44,30721.19 U1.17
PC3: P4.12 U1.18 | length 1382.9
  Top Layer w10: P4.12 48131.89,30017.72 48217.52,30103.35 48217.52,30184.76 48736.94,30704.19 48819.6,30704.19 U1.18
PC8: P5.20 U1.65 | length 1318
  Top Layer w10: U1.65 49689.31,30029.35 49898.8,30029.35 50357.28,29570.87 50521.65,29570.87 P5.20
PC9: P5.19 U1.66 | length 1172
  Top Layer w10: U1.66 49580.3,30166.2 49580.3,30164.43 49698.38,30046.35 49932,30046.35 50360.63,29617.72 P5.19
PC10: P5.14 U1.78 | length 1416.3
  Top Layer w10: U1.78 49747.05,30556.34 49747.05,30572.83 49768.44,30594.23 49793.02,30594.23 50101.47,30285.77 50101.47,30122.94 50355.31,29869.09 50519.88,29869.09 P5.14
PC11: P5.13 U1.79 | length 1280.5
  Top Layer w10: U1.79 49717.52,30554.65 49717.52,30570.87 49757.88,30611.23 49800.06,30611.23 50118.47,30292.82 50118.47,30160.07 50360.83,29917.72 P5.13
PC12: P5.12 U1.80 | length 1383.5
  Top Layer w10: U1.80 49698.82,30563.79 49698.82,30577.76 49749.29,30628.23 49807.1,30628.23 50135.47,30299.86 50135.47,30195.24 50361.22,29969.49 50520.28,29969.49 P5.12
PC13: P4.6 U1.7 | length 1814.8
  Top Layer w10: P4.6@48033.17,30317.62 48066.63,30317.62 48183.43,30434.41 48183.43,30824.04 48386.49,31027.11 48834.54,31027.11 49137.52,30724.13 49137.52,30692.5 U1.7
PC14: P4.7 U1.8 | length 1954.5
  Top Layer w10: P4.7 47979.13,30263.78 48067.91,30263.78 48200.43,30396.29 48200.43,30817 48393.53,31010.11 48827.5,31010.11 49120.52,30717.09 49120.52,30684.17 49145.67,30659.02 U1.8
PC15: P4.8 U1.9 | length 1855.6
  Top Layer w10: P4.8 48081.89,30217.72 48217.43,30353.25 48217.43,30809.96 48400.57,30993.11 48820.46,30993.11 49103.52,30710.05 49103.52,30670.82 U1.9
PD2: P5.11 U1.83 | length 1279.1
  Top Layer w10: U1.83 49591.31,30539.79 49591.31,30569.03 49667.51,30645.23 49814.14,30645.23 50152.47,30306.9 50152.47,30222.53 50357.28,30017.72 P5.11
PD3: P5.10 U1.84 | length 1384.7
  Top Layer w10: U1.84 49574.31,30550.63 49574.31,30576.07 49660.47,30662.23 49821.18,30662.23 50169.47,30313.94 50169.47,30256.71 50360.24,30065.94 50516.73,30065.94 P5.10
PD6: P5.9 U1.87 | length 1247.8
  Top Layer w10: U1.87 49619.39,30679.23 49828.23,30679.23 50186.47,30320.98 50186.47,30293.84 50362.6,30117.72 P5.9
PD12: P5.24 U1.59 | length 1470.8
  Top Layer w10: U1.59 49473.73,30077.89 49473.73,30063.88 49493.22,30044.4 49578.95,29958.66 49769.68,29958.66 50373.03,29355.31 50506.1,29355.31 P5.24
PD13: P5.23 U1.60 | length 1313.2
  Top Layer w10: U1.60 49490.73,30088.73 49490.73,30070.92 49583.31,29978.35 49803.15,29978.35 50363.78,29417.72 P5.23
PE0: P5.2 U1.97 | length 1375.5
  Top Layer w10: U1.97 49443,30781.23 50003.79,30781.23 50319.46,30465.55 50516.34,30465.55 P5.2
PE1: P5.1 U1.98 | length 1254.5
  Top Layer w10: U1.98 49432.16,30798.23 50010.83,30798.23 50291.34,30517.72 P5.1
PE2: P4.1 U1.1 | length 1808.2
  Top Layer w10: P4.1@47932.09,30517.72 48098.43,30684.05 48098.43,30859.25 48351.28,31112.11 48884.94,31112.11 U1.1
PE3: P4.2 U1.2 | length 1728.7
  Top Layer w10: P4.2@48036.42,30517.72 48115.43,30596.72 48115.43,30852.21 48358.32,31095.11 48874.1,31095.11 U1.2
PE4: P4.3 U1.3 | length 1880.9
  Top Layer w10: P4.3 47980.91,30465.55 48059.06,30465.55 48132.43,30538.92 48132.43,30845.17 48365.37,31078.11 48863.26,31078.11 U1.3
PE5: P4.4 U1.4 | length 1776.3
  Top Layer w10: P4.4 48065.35,30417.72 48149.43,30501.79 48149.43,30838.13 48372.41,31061.11 48852.42,31061.11 U1.4
PE6: P4.5 U1.5 | length 1920.6
  Top Layer w10: P4.5 47980.51,30365.16 48079.72,30365.16 48166.43,30451.86 48166.43,30831.09 48379.45,31044.11 48841.58,31044.11 U1.5
RELAY1: P2.10 U1.34 | length 2392.2
  Top Layer w10: v1(48269.68,29154.53) 48332.68,29217.52 48332.68,29380.91 48278.64,29434.94 48278.64,29753.61 48479.75,29954.72 48755.69,29954.72 U1.34
  Bottom Layer w10: P2.10 48106.89,28481.89 48205.71,28580.71 48205.71,29090.55 v1(48269.68,29154.53)
RELAY2: P2.6 U1.33 | length 2194.9
  Top Layer w10: v1(48268.7,29239.17) 48302.17,29272.64 48302.17,29355.31 48254.92,29402.56 48254.92,29753.94 48472.71,29971.72 48744.85,29971.72 U1.33
  Bottom Layer w10: P2.6 48111.02,28681.89 48167.32,28738.19 48167.32,29137.8 v1(48268.7,29239.17)
RESET: C20.2 P3.10 P6.10 S1.2 U1.14 U4.34 | length 6254.2
  Top Layer w10: U1.14 49137.11,30498.03 v1(49142.72,30498.03) ; C20.2@49159.45,28896.65 S1.2 49247.05,28673.23 49247.05,28327.76 49406.22,28168.58 U4.34 49697.13,28168.58 50013.78,28485.24 50248.03,28485.24 50370.28,28607.48 P6.10
  Bottom Layer w10: v1(49142.72,30498.03) 49271.65,30498.03 49468.5,30694.88 50257.87,30694.88 50455.91,30892.91 P3.10 50485.43,30930.31 50499.02,30943.9 50584.65,30943.9 50626.97,30901.57 50626.97,28814.96 50468.7,28656.69 P6.10
SPI1_MISO: U1.53 U3.2 | length 1075.4
  Top Layer w10: U3.2 48975.2,29174.02 49007.87,29206.69 49007.87,29369.51 49390.3,29751.94 49390.3,29994.29 U1.53
SPI1_MOSI: U1.54 U3.5 | length 1552.6
  Top Layer w10: U3.5 48641.93,29092.32 48679.13,29055.12 48968.5,29055.12 49025.59,29112.2 49025.59,29363.19 49407.3,29744.9 49407.3,30005.13 U1.54
SPI1_SCK: U1.52 U3.6 | length 1328.8
  Top Layer w10: U3.6 48769.49,29174.02 48794.29,29198.82 48970.47,29198.82 48988.19,29216.54 48988.19,29373.87 49373.3,29758.98 49373.3,29983.46 U1.52
TFT_BKLT: R6.1 R7.2 U1.26 | length 2506.2
  Top Layer w10: v1(48260.83,29307.09) 48236.22,29331.69 48236.22,29772.36 48813.27,30349.41 48890.42,30349.41 U1.26 ; v1@49201.77,29280.51 R6.1 R7.2
  Bottom Layer w10: v1@48260.83,29305.12 49177.17,29305.12 v1(49200.79,29281.5)
TFT_CS: P1.4 U1.88 | length 1423.6
  Top Layer w10: v1@49447.76,30535.43 U1.88
  Bottom Layer w10: P1.4 48635.44,29715.16 48814.4,29894.12 48814.4,30136.08 49053.32,30375 49298.23,30375 49442.5,30519.28 49442.5,30533.06 v1@49445.87,30536.42
  other v1: 49441.93,30540.35
TFT_RD: P1.7 U1.85 | length 1396.1
  Top Layer w10: v1(49509.84,30476.38) 49509.84,30514 U1.85
  Bottom Layer w10: P1.7 48753.55,29718.82 48865.4,29830.67 48865.4,30114.95 49074.44,30324 49398.06,30324 49492.13,30418.07 49492.13,30458.66 v1(49509.84,30476.38)
TFT_RS: P1.5 U1.58 | length 1487.5
  Top Layer w10: v1(49372.05,30382.87) 49372.05,30151.74 U1.58
  Bottom Layer w10: P1.5 48674.81,29711.22 48831.4,29867.81 48831.4,30129.04 49060.36,30358 49347.17,30358 v1(49372.05,30382.87)
TFT_RST: P1.8 U1.67 | length 1270.8
  Top Layer w10: v1@49495.44,30278.9 U1.67
  Bottom Layer w10: P1.8 48792.92,29734.15 48882.4,29823.63 48882.4,30107.91 49081.48,30307 49467.61,30307 v1(49495.08,30279.53)
TFT_WR: P1.6 U1.86 | length 1423.5
  Top Layer w10: v1@49466.03,30498.03 U1.86
  Bottom Layer w10: P1.6 48714.18,29715.16 48848.4,29849.38 48848.4,30122 49067.4,30341 49391.01,30341 49468.5,30418.49 v1(49468.5,30500)
VIN: F2.1 P2.1 P2.2 | length 239.2
  Top Layer w25: P2.1 P2.2 F2.1@48176.18,28881.89
WLAN_RX: U1.47 U4.21 | length 2690.9
  Top Layer w10: U1.47 48846.93,29684.06 48686.02,29684.06 48486.22,29484.25 48486.22,29095.19 48606.02,28975.39 49657.48,28975.39 49716.87,28916 U4.21
WLANTX: U1.48 U4.22 | length 2857.8
  Top Layer w10: U1.48 48855.08,29664.37 48694.18,29664.37 48505.91,29476.1 48505.91,29103.35 48614.17,28995.08 49669.29,28995.08 49745.08,28919.29 49745.08,28824.8 49727.36,28807.09 49677.17,28807.09 49660.92,28823.33 U4.22
X+: P1.29 U1.29 | length 2467.3
  Top Layer w10: v1(48693.9,30108.27) 48770.04,30108.27 U1.29
  Bottom Layer w10: v1(48693.9,30108.27) 48600.39,30108.27 48317.91,29825.79 48317.91,29602.36 48383.86,29536.42 49554.13,29536.42 49619.69,29601.97 P1.29
X-: P1.27 U1.31 | length 2291.6
  Top Layer w10: v1(48692.91,30041.34) 48758.79,30041.34 U1.31
  Bottom Layer w10: v1(48692.91,30041.34) 48581.55,30041.34 48351.91,29811.7 48351.91,29616.45 48397.94,29570.42 49508.41,29570.42 49540.95,29602.95 P1.27
Y+: P1.28 U1.30 | length 2378
  Top Layer w10: v1(48729.33,30074.8) 48729.33,30076.77 48766.38,30076.77 U1.30
  Bottom Layer w10: v1(48729.33,30074.8) 48590.97,30074.8 48334.91,29818.75 48334.91,29609.4 48390.9,29553.42 49526.84,29553.42 49580.32,29606.89 P1.28
Y-: P1.26 U1.32 | length 2222.3
  Top Layer w10: v1(48729.33,30006.89) 48729.33,30005.91 48725.39,30001.97 48747.26,30001.97 U1.32
  Bottom Layer w10: v1(48729.33,30006.89) 48571.14,30006.89 48368.91,29804.66 48368.91,29623.49 48404.98,29587.42 49495.88,29587.42 49501.58,29593.11 P1.26
pads on no net: P1. P3.7 P6.7 S1. U1.6 U1.99 U4.15

## Polygon pours and split planes (outlines as drawn)
GND on GND Plane (split plane): 50665.93,28011.24 47839.98,28011.24 47839.98,31187.58 50665.93,31187.58
3V3 on Power Plane (split plane): 50665.93,28011.24 47839.98,28011.24 47839.98,31187.58 50665.93,31187.58

## Keep-outs
Keep-Out Layer:
  the board outline again, w10

## Silkscreen, mask and mechanical layers (free items; w line width, h text height)
Top Overlay:
  text "L" at 49842.52,30199.8 h1100
  text "BB-MT-MAIN V1.0" at 48292.32,28101.38 h60

## Text inside footprints (layer, text, board x,y; h text height)
P2: Top Overlay "2" at 48016.02,28990.75 h50 r270; Top Overlay "1" at 47916.02,28970.75 h50 r270; Top Overlay "9" at 47916.02,28411.06 h50 r270; Top Overlay "10" at 48016.02,28411.06 h50 r270
P4: Top Overlay "1" at 47913.07,30629.53 h50 r270; Top Overlay "2" at 48013.07,30629.53 h50 r270; Top Overlay "23" at 47913.07,29341.97 h50 r270; Top Overlay "24" at 48013.07,29341.97 h50 r270
P5: Top Overlay "1" at 50448.5,30632.48 h50 r270; Top Overlay "2" at 50548.5,30632.48 h50 r270; Top Overlay "23" at 50448.5,29346.89 h50 r270; Top Overlay "24" at 50548.5,29346.89 h50 r270
U3: Top Overlay "o" at 48867.13,29125.98 h19.68 r180